# Allegro board KPRM_02v1.brd
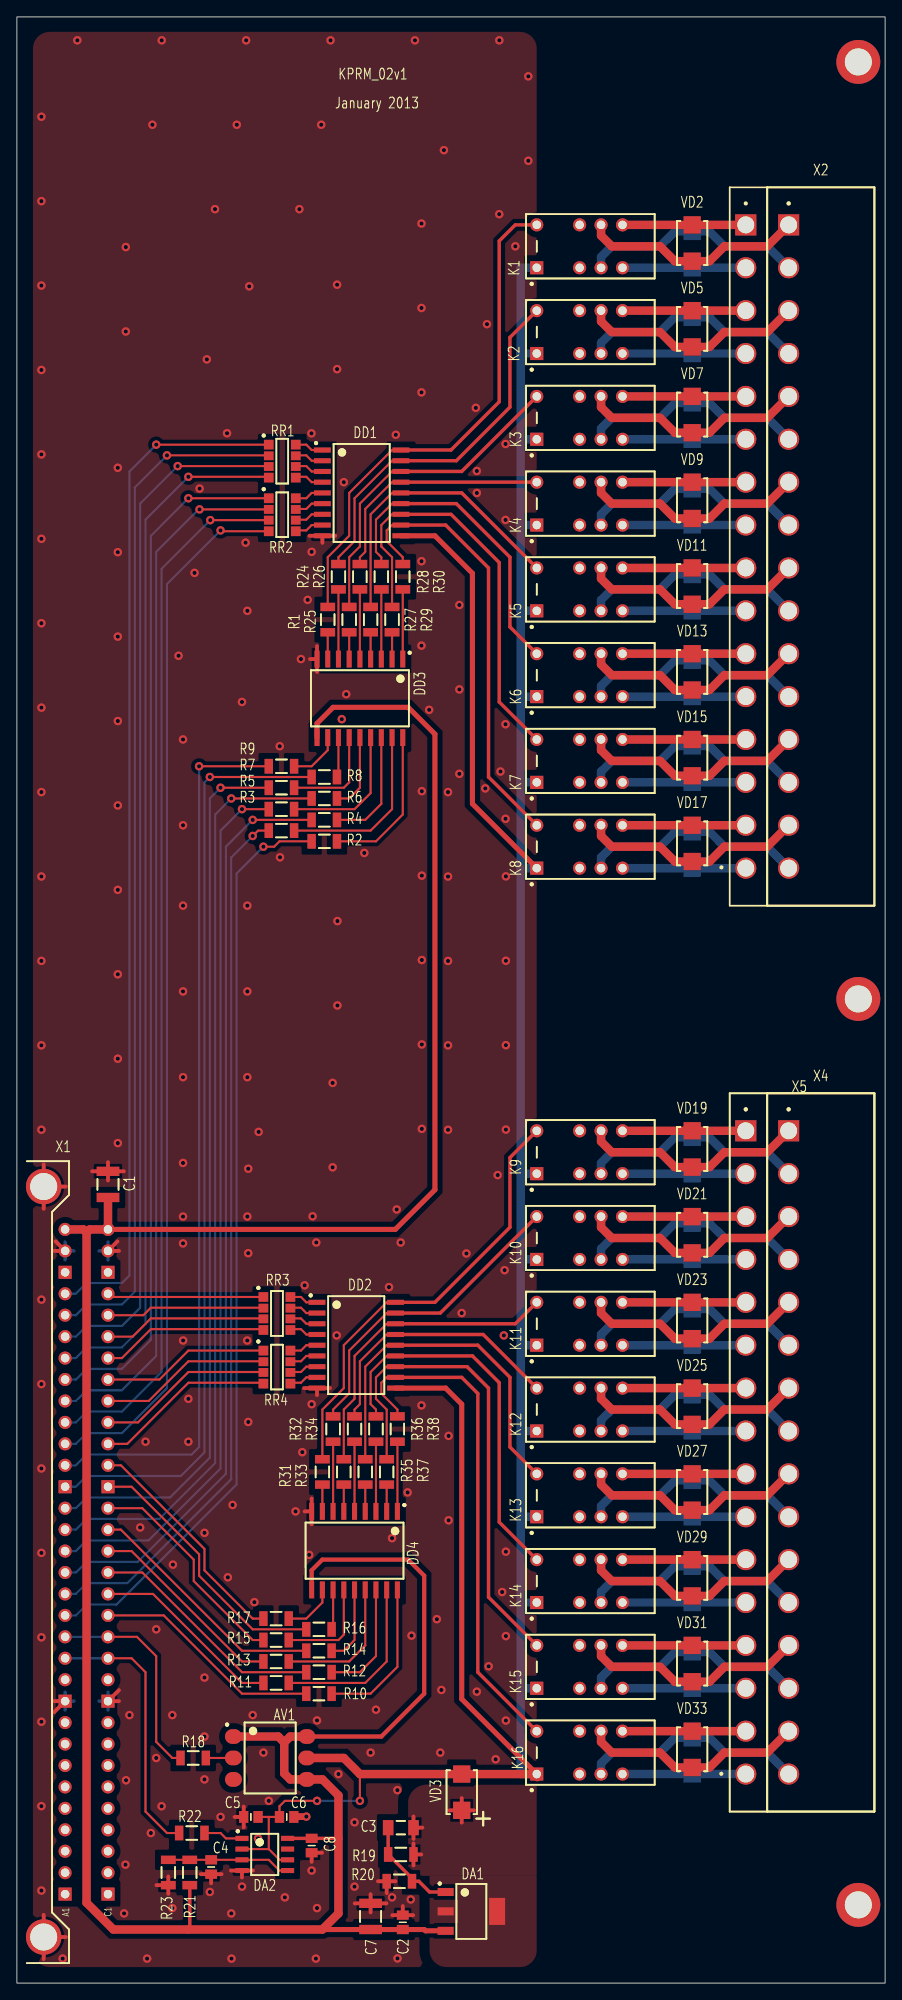
[diagram p0: board, top side]
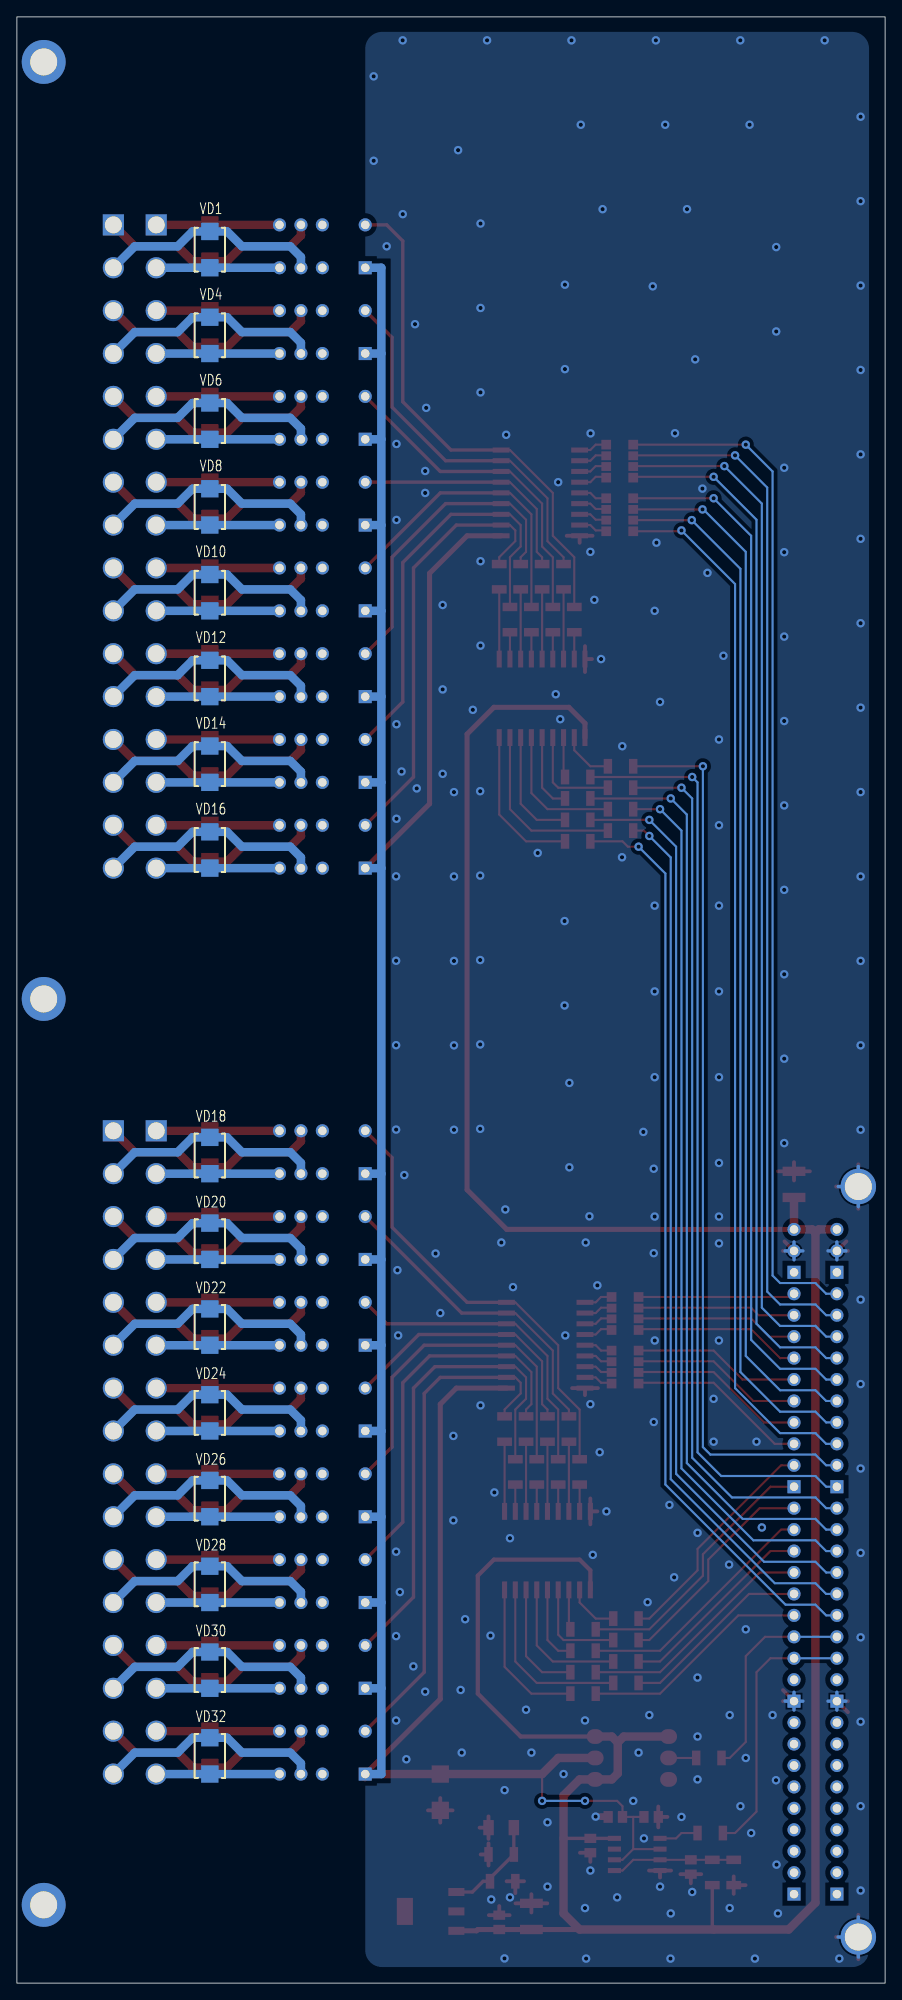
[diagram p1: board, bottom side, seen from below]

Outline 102.87 x 232.92 mm; copper layers: TOP, BOTTOM. Coordinates in mm from the lower left corner of the outline.
Outline path: rectangle 0,0 102.87,232.92

## Design rules (mm)
net group CC: nets CC0 CC1 CC2 CC3 CC4 CC5 CC6 CC7 CC8 CC9 CC10 CC11 CC12 CC13 CC14 CC15
net group CO: nets CO0 CO2 CO3 CO4 CO5 CO6 CO7 CO8 CO9 CO10 CO11 CO12 CO13 CO14 CO15

## Placement (name value [footprint] x y rotation side)
AV1  PVT412S  [SOIC254P978X342-6N]  30 26.67 0 top
C1  10,0u  [CAPC3225X270N]  10.79 94.62 90 top
C2  0,1u  [CAPC2013X95N]  45.72 7.2 90 top
C3  1,0u  [CAPC3216X95N]  45.49 18.41 180 top
C4  0,1u  [CAPC2013X95N]  23.02 13.76 270 top
C5  0,1u  [CAPC2013X95N]  27.72 19.69 180 top
C6  0,01u  [CAPC2013X95N]  31.96 19.69 0 top
C7  10,0u  [CAPC3225X270N]  41.91 7.9 90 top
C8  0,1u  [CAPC2013X95N]  34.92 16.3 270 top
DA1  LM317  [SOT230P700X180-4N]  53.85 8.5 0 top
DA2  LM293  [SOIC127P600X175-8N]  29.37 15.24 0 top
DD1  ULN2803A  [SOIC127P1030X265-18N]  40.84 176.53 0 top
DD2  ULN2803A  [SOIC127P1030X265-18N]  40.21 75.57 0 top
DD3  ULN2803A  [SOIC127P1030X265-18N]  40.64 152.19 270 top
DD4  ULN2803A  [SOIC127P1030X265-18N]  40 51.23 270 top
K1  FX2  [RELAY_FX2]  67.94 205.74 90 top
K2  FX2  [RELAY_FX2]  67.94 195.58 90 top
K3  FX2  [RELAY_FX2]  67.94 185.42 90 top
K4  FX2  [RELAY_FX2]  67.94 175.26 90 top
K5  FX2  [RELAY_FX2]  67.94 165.1 90 top
K6  FX2  [RELAY_FX2]  67.94 154.94 90 top
K7  FX2  [RELAY_FX2]  67.94 144.78 90 top
K8  FX2  [RELAY_FX2]  67.94 134.62 90 top
K9  FX2  [RELAY_FX2]  67.94 98.43 90 top
K10  FX2  [RELAY_FX2]  67.94 88.27 90 top
K11  FX2  [RELAY_FX2]  67.94 78.11 90 top
K12  FX2  [RELAY_FX2]  67.94 67.95 90 top
K13  FX2  [RELAY_FX2]  67.94 57.78 90 top
K14  FX2  [RELAY_FX2]  67.94 47.62 90 top
K15  FX2  [RELAY_FX2]  67.94 37.47 90 top
K16  FX2  [RELAY_FX2]  67.94 27.3 90 top
NOREF  -  [unnamed]  99.69 227.58 0 top
NOREF#2  -  [unnamed]  99.69 9.27 0 top
NOREF#3  -  [unnamed]  99.69 116.59 0 top
R1  18k  [RESC3116X65N]  36.83 161.52 90 top
R2  2k  [RESC3116X65N]  36.42 135.25 0 top
R3  2k  [RESC3116X65N]  31.34 136.53 0 top
R4  2k  [RESC3116X65N]  36.42 137.8 0 top
R5  2k  [RESC3116X65N]  31.34 139.06 0 top
R6  2k  [RESC3116X65N]  36.42 140.34 0 top
R7  2k  [RESC3116X65N]  31.34 141.61 0 top
R8  2k  [RESC3116X65N]  36.42 142.88 0 top
R9  2k  [RESC3116X65N]  31.34 144.15 0 top
R10  2k  [RESC3116X65N]  35.79 34.29 0 top
R11  2k  [RESC3116X65N]  30.71 35.56 0 top
R12  2k  [RESC3116X65N]  35.79 36.83 0 top
R13  2k  [RESC3116X65N]  30.71 38.1 0 top
R14  2k  [RESC3116X65N]  35.79 39.37 0 top
R15  2k  [RESC3116X65N]  30.71 40.64 0 top
R16  2k  [RESC3116X65N]  35.79 41.91 0 top
R17  2k  [RESC3116X65N]  30.71 43.18 0 top
R18  2k  [RESC3116X65N]  20.88 26.67 180 top
R19  270  [RESC3116X65N]  45.49 15.24 180 top
R20  1k  [RESC3116X65N]  45.31 12.07 0 top
R21  20k  [RESC3116X65N]  20.48 13.11 90 top
R22  2k  [RESC3116X65N]  20.72 17.78 180 top
R23  10k  [RESC3116X65N]  17.94 13.11 90 top
R24  18k  [RESC3116X65N]  38.1 166.6 90 top
R25  18k  [RESC3116X65N]  39.37 161.52 90 top
R26  18k  [RESC3116X65N]  40.64 166.6 90 top
R27  18k  [RESC3116X65N]  41.91 161.52 90 top
R28  18k  [RESC3116X65N]  43.18 166.6 90 top
R29  18k  [RESC3116X65N]  44.45 161.52 90 top
R30  18k  [RESC3116X65N]  45.72 166.6 90 top
R31  18k  [RESC3116X65N]  36.19 60.55 90 top
R32  18k  [RESC3116X65N]  37.46 65.64 90 top
R33  18k  [RESC3116X65N]  38.73 60.55 90 top
R34  18k  [RESC3116X65N]  40 65.64 90 top
R35  18k  [RESC3116X65N]  41.27 60.55 90 top
R36  18k  [RESC3116X65N]  42.54 65.64 90 top
R37  18k  [RESC3116X65N]  43.81 60.55 90 top
R38  18k  [RESC3116X65N]  45.08 65.64 90 top
RR1  4,7k  [RESCAX127P320X508X70-8N]  31.44 180.29 0 top
RR2  4,7k  [RESCAX127P320X508X70-8N]  31.44 173.94 0 top
RR3  4,7k  [RESCAX127P320X508X70-8N]  30.81 79.33 0 top
RR4  4,7k  [RESCAX127P320X508X70-8N]  30.81 72.98 0 top
VD1  300V  [DIOM5236X261N]  80.01 205.35 90 bottom
VD2  300V  [DIOM5236X261N]  80.01 206.13 90 top
VD3  STPS160U  [DIOM5236X261N]  52.7 22.62 270 top
VD4  300V  [DIOM5236X261N]  80.01 195.19 90 bottom
VD5  300V  [DIOM5236X261N]  80.01 195.97 90 top
VD6  300V  [DIOM5236X261N]  80.01 185.03 90 bottom
VD7  300V  [DIOM5236X261N]  80.01 185.81 90 top
VD8  300V  [DIOM5236X261N]  80.01 174.87 90 bottom
VD9  300V  [DIOM5236X261N]  80.01 175.65 90 top
VD10  300V  [DIOM5236X261N]  80.01 164.71 90 bottom
VD11  300V  [DIOM5236X261N]  80.01 165.49 90 top
VD12  300V  [DIOM5236X261N]  80.01 154.55 90 bottom
VD13  300V  [DIOM5236X261N]  80.01 155.33 90 top
VD14  300V  [DIOM5236X261N]  80.01 144.39 90 bottom
VD15  300V  [DIOM5236X261N]  80.01 145.17 90 top
VD16  300V  [DIOM5236X261N]  80.01 134.23 90 bottom
VD17  300V  [DIOM5236X261N]  80.01 135.01 90 top
VD18  300V  [DIOM5236X261N]  80.01 98.04 90 bottom
VD19  300V  [DIOM5236X261N]  80.01 98.82 90 top
VD20  300V  [DIOM5236X261N]  80.01 87.88 90 bottom
VD21  300V  [DIOM5236X261N]  80.01 88.66 90 top
VD22  300V  [DIOM5236X261N]  80.01 77.72 90 bottom
VD23  300V  [DIOM5236X261N]  80.01 78.5 90 top
VD24  300V  [DIOM5236X261N]  80.01 67.56 90 bottom
VD25  300V  [DIOM5236X261N]  80.01 68.34 90 top
VD26  300V  [DIOM5236X261N]  80.01 57.39 90 bottom
VD27  300V  [DIOM5236X261N]  80.01 58.17 90 top
VD28  300V  [DIOM5236X261N]  80.01 47.23 90 bottom
VD29  300V  [DIOM5236X261N]  80.01 48.02 90 top
VD30  300V  [DIOM5236X261N]  80.01 37.08 90 bottom
VD31  300V  [DIOM5236X261N]  80.01 37.85 90 top
VD32  300V  [DIOM5236X261N]  80.01 26.91 90 bottom
VD33  300V  [DIOM5236X261N]  80.01 27.7 90 top
X1  DIN 32x2 MR  [DIN_41612_64_MR]  2.54 49.91 0 top
X2  231-576/001-000  [WAGO_231_576_001_000]  95.25 170.18 0 top
X3  232-376  [WAGO_232_376]  92.71 170.18 0 top
X4  231-576/001-000  [WAGO_231_576_001_000]  95.25 62.87 0 top
X5  232-376  [WAGO_232_376]  92.71 62.87 0 top

## Library data of the parts
AV1 = PVT412: alternate symbols: (SOIC254P978X342-6M)
C1-C8 = CAP_NP
DA1 = LM317EMP
DA2 = LM293
DD1-DD4 = ULN2803A
K1-K16 = RELAY_FX2
R1-R38 = RES_0.25W
RR1-RR4 = RES_ARRAY_4
VD1 VD2 VD4-VD33 = DIODE_TVS_BI
VD3 = DIODE_SCHOTTKY
X1 = CON_32X2
X2-X5 = CON_16

## Footprints (pads in the part's own frame, mm; a bottom-side part is the same pattern mirrored in y, then rotated)
CAPC2013X95N
  rect 1.1x1.4 smd: 1(-0.85,0) 2(0.85,0)
CAPC3216X95N
  rect 1.25x1.8 smd: 1(-1.5,0) 2(1.5,0)
CAPC3225X270N
  rect 1.1x2.7 smd: 1(-1.55,0) 2(1.55,0)
DIN_41612_64_MR
  rect 1.55x1.55 hole 1: A1(3.175,-39.37) A10(3.175,-16.51) A20(3.175,8.89) A30(3.175,34.29) C1(8.255,-39.37) C10(8.255,-16.51) C20(8.255,8.89) C30(8.255,34.29)
  round 1.55 hole 1: A2(3.175,-36.83) A3(3.175,-34.29) A4(3.175,-31.75) A5(3.175,-29.21) A6(3.175,-26.67) A7(3.175,-24.13) A8(3.175,-21.59) A9(3.175,-19.05) A11(3.175,-13.97) A12(3.175,-11.43) A13(3.175,-8.89) A14(3.175,-6.35) A15(3.175,-3.81) A16(3.175,-1.27) A17(3.175,1.27) A18(3.175,3.81) A19(3.175,6.35) A21(3.175,11.43) A22(3.175,13.97) A23(3.175,16.51) A24(3.175,19.05) A25(3.175,21.59) A26(3.175,24.13) A27(3.175,26.67) A28(3.175,29.21) A29(3.175,31.75) A31(3.175,36.83) A32(3.175,39.37) C2(8.255,-36.83) C3(8.255,-34.29) C4(8.255,-31.75) C5(8.255,-29.21) C6(8.255,-26.67) C7(8.255,-24.13) C8(8.255,-21.59) C9(8.255,-19.05) C11(8.255,-13.97) C12(8.255,-11.43) C13(8.255,-8.89) C14(8.255,-6.35) C15(8.255,-3.81) C16(8.255,-1.27) C17(8.255,1.27) C18(8.255,3.81) C19(8.255,6.35) C21(8.255,11.43) C22(8.255,13.97) C23(8.255,16.51) C24(8.255,19.05) C25(8.255,21.59) C26(8.255,24.13) C27(8.255,26.67) C28(8.255,29.21) C29(8.255,31.75) C31(8.255,36.83) C32(8.255,39.37)
  round 4.2 hole 3.2: HOLE1(0.635,-44.45) HOLE2(0.635,44.45)
DIOM5236X261N
  rect 2.05x2.05 smd: A(2.15,0) C(-2.15,0)
RELAY_FX2
  rect 1.55x1.55 hole 1: 1(-2.54,6.35)
  round 1.55 hole 1: 3(-2.54,1.27) 4(-2.54,-1.27) 5(-2.54,-3.81) 6(2.54,-3.81) 7(2.54,-1.27) 8(2.54,1.27) 10(2.54,6.35)
RESC3116X65N
  rect 1x1.75 smd: 1(-1.5,0) 2(1.5,0)
RESCAX127P320X508X70-8N
  rect 1.15x1.15 smd: 1(-1.6,1.955) 4(-1.6,-1.955) 5(1.6,-1.955) 8(1.6,1.955)
  rect 1.15x1.05 smd: 2(-1.6,0.635) 3(-1.6,-0.635) 6(1.6,-0.635) 7(1.6,0.635)
SOIC127P600X175-8N
  rect 1.55x0.6 smd: 1(-2.7,1.905) 2(-2.7,0.635) 3(-2.7,-0.635) 4(-2.7,-1.905) 5(2.7,-1.905) 6(2.7,-0.635) 7(2.7,0.635) 8(2.7,1.905)
SOIC127P1030X265-18N
  rect 2x0.6 smd: 1(-4.65,5.08) 2(-4.65,3.81) 3(-4.65,2.54) 4(-4.65,1.27) 5(-4.65,0) 6(-4.65,-1.27) 7(-4.65,-2.54) 8(-4.65,-3.81) 9(-4.65,-5.08) 10(4.65,-5.08) 11(4.65,-3.81) 12(4.65,-2.54) 13(4.65,-1.27) 14(4.65,0) 15(4.65,1.27) 16(4.65,2.54) 17(4.65,3.81) 18(4.65,5.08)
SOIC254P978X342-6N
  oval 2x1.75 smd: 1(-4.35,2.54) 2(-4.35,0) 3(-4.35,-2.54) 4(4.35,-2.54) 5(4.35,0) 6(4.35,2.54)
SOT230P700X180-4N
  rect 1.9x0.95 smd: 1(-3.05,2.3) 2(-3.05,0) 3(-3.05,-2.3)
  rect 1.9x3.2 smd: 4(3.05,0)
unnamed
  round 5.2 hole 3.2: 1(0,0)
WAGO_231_576_001_000
  rect 2.5x2.5 hole 2: 1(-3.81,38.1)
  round 2.5 hole 2: 2(-3.81,33.02) 3(-3.81,27.94) 4(-3.81,22.86) 5(-3.81,17.78) 6(-3.81,12.7) 7(-3.81,7.62) 8(-3.81,2.54) 9(-3.81,-2.54) 10(-3.81,-7.62) 11(-3.81,-12.7) 12(-3.81,-17.78) 13(-3.81,-22.86) 14(-3.81,-27.94) 15(-3.81,-33.02) 16(-3.81,-38.1)
WAGO_232_376
  rect 2.5x2.5 hole 2: 1(-6.35,38.1)
  round 2.5 hole 2: 2(-6.35,33.02) 3(-6.35,27.94) 4(-6.35,22.86) 5(-6.35,17.78) 6(-6.35,12.7) 7(-6.35,7.62) 8(-6.35,2.54) 9(-6.35,-2.54) 10(-6.35,-7.62) 11(-6.35,-12.7) 12(-6.35,-17.78) 13(-6.35,-22.86) 14(-6.35,-27.94) 15(-6.35,-33.02) 16(-6.35,-38.1)

## Nets
GNDE: C1.2 C2.2 C4.2 C5.2 C6.2 C7.2 C8.2 DA2.4 DD1.9(GND) DD2.9(GND) DD3.9(GND) DD4.9(GND) R20.1 R23.1 X1.A10 X1.A31 X1.C10 X1.C31 X1.HOLE1 X1.HOLE2
1K1-1: K1.5(NO1) VD1.C X3.2
1K1-2: K1.4(01) VD1.A X2.2
1K2-1: K1.6(NO2) VD2.A X3.1
1K2-2: K1.7(02) VD2.C X2.1
2K1-1: K2.5(NO1) VD4.C X3.4
2K1-2: K2.4(01) VD4.A X2.4
2K2-1: K2.6(NO2) VD5.A X3.3
2K2-2: K2.7(02) VD5.C X2.3
3K1-1: K3.5(NO1) VD6.C X3.6
3K1-2: K3.4(01) VD6.A X2.6
3K2-1: K3.6(NO2) VD7.A X3.5
3K2-2: K3.7(02) VD7.C X2.5
4K1-1: K4.5(NO1) VD8.C X3.8
4K1-2: K4.4(01) VD8.A X2.8
4K2-1: K4.6(NO2) VD9.A X3.7
4K2-2: K4.7(02) VD9.C X2.7
5K1-1: K5.5(NO1) VD10.C X3.10
5K1-2: K5.4(01) VD10.A X2.10
5K2-1: K5.6(NO2) VD11.A X3.9
5K2-2: K5.7(02) VD11.C X2.9
6K1-1: K6.5(NO1) VD12.C X3.12
6K1-2: K6.4(01) VD12.A X2.12
6K2-1: K6.6(NO2) VD13.A X3.11
6K2-2: K6.7(02) VD13.C X2.11
7K1-1: K7.5(NO1) VD14.C X3.14
7K1-2: K7.4(01) VD14.A X2.14
7K2-1: K7.6(NO2) VD15.A X3.13
7K2-2: K7.7(02) VD15.C X2.13
8K1-1: K8.5(NO1) VD16.C X3.16
8K1-2: K8.4(01) VD16.A X2.16
8K2-1: K8.6(NO2) VD17.A X3.15
8K2-2: K8.7(02) VD17.C X2.15
9K1-1: K9.5(NO1) VD18.C X5.2
9K1-2: K9.4(01) VD18.A X4.2
9K2-1: K9.6(NO2) VD19.A X5.1
9K2-2: K9.7(02) VD19.C X4.1
10K1-1: K10.5(NO1) VD20.C X5.4
10K1-2: K10.4(01) VD20.A X4.4
10K2-1: K10.6(NO2) VD21.A X5.3
10K2-2: K10.7(02) VD21.C X4.3
11K1-1: K11.5(NO1) VD22.C X5.6
11K1-2: K11.4(01) VD22.A X4.6
11K2-1: K11.6(NO2) VD23.A X5.5
11K2-2: K11.7(02) VD23.C X4.5
12K1-1: K12.5(NO1) VD24.C X5.8
12K1-2: K12.4(01) VD24.A X4.8
12K2-1: K12.6(NO2) VD25.A X5.7
12K2-2: K12.7(02) VD25.C X4.7
13K1-1: K13.5(NO1) VD26.C X5.10
13K1-2: K13.4(01) VD26.A X4.10
13K2-1: K13.6(NO2) VD27.A X5.9
13K2-2: K13.7(02) VD27.C X4.9
14K1-1: K14.5(NO1) VD28.C X5.12
14K1-2: K14.4(01) VD28.A X4.12
14K2-1: K14.6(NO2) VD29.A X5.11
14K2-2: K14.7(02) VD29.C X4.11
15K1-1: K15.5(NO1) VD30.C X5.14
15K1-2: K15.4(01) VD30.A X4.14
15K2-1: K15.6(NO2) VD31.A X5.13
15K2-2: K15.7(02) VD31.C X4.13
16K1-1: K16.5(NO1) VD32.C X5.16
16K1-2: K16.4(01) VD32.A X4.16
16K2-1: K16.6(NO2) VD33.A X5.15
16K2-2: K16.7(02) VD33.C X4.15
+24BE: AV1.1 AV1.4 AV1.6 C1.1 C2.1 C7.1 C8.1 DA1.3(IN) DA2.8 DD3.10(COM) DD4.10(COM) R21.1 X1.A32 X1.C32
+UK: AV1.5 C5.1 C6.1 DA2.2(IN-) DA2.6(IN-) DD1.10(COM) DD2.10(COM) K1.1(IN+) K2.1(IN+) K3.1(IN+) K4.1(IN+) K5.1(IN+) K6.1(IN+) K7.1(IN+) K8.1(IN+) K9.1(IN+) K10.1(IN+) K11.1(IN+) K12.1(IN+) K13.1(IN+) K14.1(IN+) K15.1(IN+) K16.1(IN+) VD3.C
CC0: DD3.8(8B) R1.1
CC1: DD3.7(7B) R24.1
CC2: DD3.6(6B) R25.1
CC3: DD3.5(5B) R26.1
CC4: DD3.4(4B) R27.1
CC5: DD3.3(3B) R28.1
CC6: DD3.2(2B) R29.1
CC7: DD3.1(1B) R30.1
CC8: DD4.8(8B) R31.1
CC9: DD4.7(7B) R32.1
CC10: DD4.6(6B) R33.1
CC11: DD4.5(5B) R34.1
CC12: DD4.4(4B) R35.1
CC13: DD4.3(3B) R36.1
CC14: DD4.2(2B) R37.1
CC15: DD4.1(1B) R38.1
CO0: DD1.18(1C) K1.10(IN-) R1.2
CO1: DD1.17(2C) K2.10(IN-) R24.2
CO2: DD1.16(3C) K3.10(IN-) R25.2
CO3: DD1.15(4C) K4.10(IN-) R26.2
CO4: DD1.14(5C) K5.10(IN-) R27.2
CO5: DD1.13(6C) K6.10(IN-) R28.2
CO6: DD1.12(7C) K7.10(IN-) R29.2
CO7: DD1.11(8C) K8.10(IN-) R30.2
CO8: DD2.18(1C) K9.10(IN-) R31.2
CO9: DD2.17(2C) K10.10(IN-) R32.2
CO10: DD2.16(3C) K11.10(IN-) R33.2
CO11: DD2.15(4C) K12.10(IN-) R34.2
CO12: DD2.14(5C) K13.10(IN-) R35.2
CO13: DD2.13(6C) K14.10(IN-) R36.2
CO14: DD2.12(7C) K15.10(IN-) R37.2
CO15: DD2.11(8C) K16.10(IN-) R38.2
COMO0: RR1.1 X1.A29
COMO1: RR1.2 X1.A28
COMO2: RR1.3 X1.A27
COMO3: RR1.4 X1.A26
COMO4: RR2.1 X1.A25
COMO5: RR2.2 X1.A24
COMO6: RR2.3 X1.A23
COMO7: RR2.4 X1.A22
COMO8: RR3.1 X1.C29
COMO9: RR3.2 X1.C28
COMO10: RR3.3 X1.C27
COMO11: RR3.4 X1.C26
COMO12: RR4.1 X1.C25
COMO13: RR4.2 X1.C24
COMO14: RR4.3 X1.C23
COMO15: RR4.4 X1.C22
ENABLE: R18.2 X1.A13 X1.C13
KCOMO0: R9.1 X1.A21
KCOMO1: R8.1 X1.A20
KCOMO2: R7.1 X1.A19
KCOMO3: R6.1 X1.A18
KCOMO4: R5.1 X1.A17
KCOMO5: R4.1 X1.A16
KCOMO6: R3.1 X1.A15
KCOMO7: R2.1 X1.A14
KCOMO8: R17.1 X1.C21
KCOMO9: R16.1 X1.C20
KCOMO10: R15.1 X1.C19
KCOMO11: R14.1 X1.C18
KCOMO12: R13.1 X1.C17
KCOMO13: R12.1 X1.C16
KCOMO14: R11.1 X1.C15
KCOMO15: R10.1 X1.C14
KENABLE: R22.2 X1.A12 X1.C12
N1355638: C3.1 DA1.2(OUT#1) DA1.4(OUT#2) R19.1 VD3.A
N1355646: C4.1 DA2.3(IN+) DA2.5(IN+) R21.2 R23.2
N1356446: DD1.4(4B) RR1.5
N1356458: DD1.3(3B) RR1.6
N1356478: DD1.2(2B) RR1.7
N1356494: DD1.1(1B) RR1.8
N1356502: DD1.5(5B) RR2.8
N1356524: DD1.6(6B) RR2.7
N1356542: DD1.7(7B) RR2.6
N1356554: DD1.8(8B) RR2.5
N1357124: DD2.4(4B) RR3.5
N1357136: DD2.3(3B) RR3.6
N1357148: DD2.2(2B) RR3.7
N1357164: DD2.1(1B) RR3.8
N1357172: DD2.5(5B) RR4.8
N1357190: DD2.6(6B) RR4.7
N1357214: DD2.7(7B) RR4.6
N1357226: DD2.8(8B) RR4.5
N1358398: C3.2 DA1.1(ADJ) R19.2 R20.2
N1359348: DD3.15(4C) R5.2
N1359364: DD3.14(5C) R6.2
N1359384: DD3.13(6C) R7.2
N1359396: DD3.12(7C) R8.2
N1359412: DD3.11(8C) R9.2
N1359430: DD3.16(3C) R4.2
N1359442: DD3.17(2C) R3.2
N1359460: DD3.18(1C) R2.2
N1359476: DD4.18(1C) R10.2
N1359548: DD4.17(2C) R11.2
N1359630: DD4.16(3C) R12.2
N1359720: DD4.15(4C) R13.2
N1359780: DD4.14(5C) R14.2
N1359844: DD4.13(6C) R15.2
N1359856: DD4.12(7C) R16.2
N1359868: DD4.11(8C) R17.2
N1360082: AV1.2 R18.1
N1360698: DA2.1(OUT) R22.1

Pads without a net: AV1 3; DA2 7; K1 3 8; K2 3 8; K3 3 8; K4 3 8; K5 3 8; K6 3 8; K7 3 8; K8 3 8; K9 3 8; K10 3 8; K11 3 8; K12 3 8; K13 3 8; K14 3 8; K15 3 8; K16 3 8; NOREF 1; NOREF#2 1; NOREF#3 1; X1 A1 A2 A3 A4 A5 A6 A7 A8 A9 A11 A30 C1 C2 C3 C4 C5 C6 C7 C8 C9 C11 C30

## Via types
v1: diameter 1, hole 0.5, TOP to BOTTOM, 223 vias

## Routing (per net, layer and track width the routed paths; a pad name or vN(x,y) marks a point on that pad's centre or on a via; arc(x,y) is an arc through that point)
GNDE: length 111.1
  TOP w0.453: 26.88,18.46 C5.2 ; C5.2 26.88,20.91 ; C5.2 25.8,19.69 ; X1.HOLE1 3.17,8.09 ; X1.HOLE1 5.8,5.46 ; X1.HOLE1 3.17,2.83 ; 21.79,12.91 C4.2 ; C4.2 23.02,11.83 ; C4.2 24.25,12.91 ; 8.92,96.17 C1.2 ; C1.2 10.79,95.09 ; C1.2 12.67,96.17 ; C1.2 10.79,97.24 ; 34.03,70.48 DD2.9 ; DD2.9 37.09,70.48 ; DD2.9 35.56,69.66 ; X1.HOLE2 5.8,94.36 ; X1.HOLE2 3.17,91.73 ; X1.HOLE2 3.17,96.99 ; 42.79,12.07 R20.1 ; R20.1 43.81,10.66 ; R20.1 44.84,12.07 ; DD3.9 35.56,158.37 ; DD3.9 34.73,156.84 ; DD3.9 35.56,155.32 ; DD1.9 37.72,171.45 ; DD1.9 36.19,170.62 ; DD1.9 34.67,171.45 ; 40.03,9.45 41.91,9.45 ; 41.91,9.45 41.91,8.37 ; 41.91,9.45 41.91,10.53 ; 41.91,9.45 43.79,9.45 ; 11.92,87.86 X1.C31 12.1,86.74 ; 12.1,33.4 X1.C10 12.1,34.7 ; 34.92,54.35 DD4.9 ; DD4.9 34.92,57.41 ; DD4.9 34.1,55.88 ; 25.37,13.34 DA2.4 ; DA2.4 27.97,13.34 ; DA2.4 26.67,12.51 ; R23.1 17.94,12.63 ; R23.1 16.54,11.61 ; R23.1 17.94,10.58 ; 34.92,14.37 C8.2 36.15,15.45 ; 4.41,33.4 X1.A10 4.41,32.1 ; 4.41,86.74 X1.A31 4.59,87.86 ; 44.49,8.05 C2.2 ; C2.2 45.72,9.13 ; C2.2 46.95,8.05
  TOP w0.8: C6.2 32.85,19.73 v1(34.29,19.73)
  BOTTOM w0.403: X1.A10 6.77,33.4 ; X1.A10 5.71,32.35 ; X1.A10 4.66,33.4 ; X1.A10 5.71,34.45 ; X1.HOLE1 3.17,7.84 ; X1.HOLE1 5.55,5.46 ; X1.HOLE1 3.17,3.08 ; X1.C31 11.85,86.74 ; X1.C31 9.74,86.74 ; X1.C31 10.79,87.8 ; X1.C31 10.79,85.69 ; 4.66,86.74 X1.A31 ; X1.A31 5.71,85.69 ; X1.A31 6.77,86.74 ; X1.A31 5.71,87.8 ; 10.79,32.35 X1.C10 ; X1.C10 10.79,34.45 ; X1.C10 9.74,33.4 ; X1.C10 11.85,33.4 ; X1.HOLE2 5.55,94.36 ; X1.HOLE2 3.17,96.74 ; X1.HOLE2 3.17,91.98
  vias: v1(2.9,221.09) v1(2.9,211.09) v1(2.9,201.09) v1(2.9,191.09) v1(2.9,181.09) v1(2.9,171.09) v1(2.9,161.09) v1(2.9,151.09) v1(2.9,141.09) v1(2.9,131.09) v1(2.9,121.09) v1(2.9,111.09) v1(2.9,101.09) v1(2.9,80.96) v1(2.9,70.96) v1(2.9,60.96) v1(2.9,50.96) v1(2.9,40.96) v1(2.9,30.96) v1(2.9,20.96) v1(2.9,10.96) v1(5.43,2.91) v1(7.16,230.14) v1(11.96,179.51) v1(11.96,169.51) v1(11.96,159.51) v1(11.96,149.51) v1(11.96,139.51) v1(11.96,129.51) v1(11.96,119.51) v1(11.96,109.51) v1(11.96,99.51) v1(12.7,8.26) v1(12.9,205.65) v1(12.9,195.65) v1(12.93,24.03) v1(12.86,14.03) v1(13.33,31.75) v1(14.6,53.98) v1(15.24,64.14) v1(15.43,2.91) v1(15.88,17.78) v1(16.06,220.14) v1(16.51,41.91) v1(16.51,26.67) v1(17.16,230.14) v1(17.14,20.95) v1(18.41,31.75) v1(18.41,8.89) v1(18.49,49.57) v1(19.16,157.24) v1(19.68,147.32) v1(19.68,137.16) v1(19.68,127.64) v1(19.68,117.48) v1(19.68,107.32) v1(19.68,97.16) v1(19.68,90.81) v1(19.68,87.63) v1(19.69,76.12) v1(20.32,69.22) v1(20.32,64.14) v1(21.05,167.06) v1(21.65,177.04) v1(22.22,53.34) v1(22.22,36.2) v1(22.22,29.21) v1(22.22,24.13) v1(22.51,192.35) v1(22.86,10.79) v1(23.47,210.14) v1(24.13,19.69) v1(24.9,183.6) v1(25,48.07) v1(25.4,8.26) v1(25.43,2.91) v1(25.56,56.64) v1(26.06,220.14) v1(26.67,151.77) v1(26.67,11.43) v1(27.1,170.63) v1(27.16,230.14) v1(27.3,162.56) v1(27.3,127.64) v1(27.3,117.48) v1(27.3,107.32) v1(27.3,90.81) v1(27.29,76.12) v1(27.41,96.47) v1(27.41,86.47) v1(27.41,66.47) v1(27.53,201) v1(27.94,31.75) v1(28.14,45.13) v1(28.57,17.14) v1(28.65,100.83) v1(29.21,27.3) v1(29.84,21.59) v1(31.14,146.52) v1(31.17,133.37) v1(31.75,10.16) v1(33.02,55.88) v1(33.47,210.14) v1(33.65,156.84) v1(33.82,62.89) v1(34.09,82.66) v1(34.45,163.86) v1(34.64,50.73) v1(34.9,183.58) v1(34.92,169.55) v1(34.92,68.58) v1(34.92,13.34) v1(35.03,90.83) v1(35.43,2.91) v1(35.47,87.73) v1(35.56,31.12) v1(35.56,8.89) v1(36.06,220.14) v1(37.16,230.14) v1(37.41,106.64) v1(37.41,96.64) v1(37.94,201.19) v1(37.94,191.19) v1(37.89,76.73) v1(37.98,125.81) v1(37.98,115.81) v1(38.1,24.77) v1(38.49,149.72) v1(38.73,177.8) v1(39.02,152.68) v1(40,19.05) v1(40,11.43) v1(41.16,133.88) v1(41.91,27.3) v1(42.54,32.38) v1(44.09,82.45) v1(44.45,52.7) v1(44.45,10.16) v1(44.9,183.41) v1(45,91.65) v1(45.08,22.86) v1(45.09,2.93) v1(45.47,87.73) v1(46.29,58.12) v1(46.66,9.91) v1(46.76,41.16) v1(47.16,230.14) v1(47.94,208.44) v1(47.94,198.44) v1(47.94,188.44) v1(47.94,168.44) v1(47.94,158.44) v1(47.94,68.44) v1(47.98,141.19) v1(47.98,131.19) v1(47.98,121.19) v1(47.98,111.19) v1(47.98,101.19) v1(48.85,150.83) v1(49.76,43.11) v1(50.16,27.3) v1(50.29,34.73) v1(50.59,217.13) v1(51.08,141.09) v1(51.08,131.09) v1(51.08,121.09) v1(51.08,111.09) v1(51.08,101.09) v1(51.15,64.82) v1(51.15,54.82) v1(52.42,163.25) v1(52.42,153.25) v1(52.42,143.25) v1(52.7,79.38) v1(53.26,86.43) v1(54.37,186.6) v1(54.49,179.12) v1(54.49,176.53) v1(54.49,34.52) v1(55.49,141.53) v1(55.7,196.52) v1(55.89,37.52) v1(56.72,26.52) v1(56.97,95.72) v1(57.16,230.14) v1(57.15,209.55) v1(57.29,143.53) v1(57.49,46.32) v1(57.69,76.73) v1(57.78,84.46) v1(57.89,182.33) v1(57.89,173.33) v1(57.89,149.12) v1(57.89,137.93) v1(57.94,131.11) v1(57.94,121.11) v1(57.94,111.11) v1(57.94,101.11) v1(57.94,51.11) v1(57.94,41.11) v1(57.94,31.11) v1(59.05,205.74) v1(60.59,225.87) v1(60.59,215.87)
1K1-1: length 14.6
  BOTTOM w1: K1.5 X3.2
1K1-2: length 26.5
  BOTTOM w1: K1.4 69.21,204.47 70.48,205.74 76.2,205.74 77.96,207.5 VD1.A 82.06,207.5 83.82,205.74 88.9,205.74 X2.2
1K2-1: length 14.6
  TOP w1: K1.6 VD2.A X3.1
1K2-2: length 26.5
  TOP w1: X2.1 88.9,205.74 83.82,205.74 82.06,203.98 77.96,203.98 76.2,205.74 70.48,205.74 69.21,207.01 K1.7
2K1-1: length 14.6
  BOTTOM w1: K2.5 VD4.C X3.4
2K1-2: length 26.5
  BOTTOM w1: X2.4 88.9,195.58 83.82,195.58 82.06,197.34 VD4.A 77.96,197.34 76.2,195.58 70.48,195.58 69.21,194.31 K2.4
2K2-1: length 14.6
  TOP w1: K2.6 VD5.A X3.3
2K2-2: length 26.5
  TOP w1: K2.7 69.21,196.85 70.48,195.58 76.2,195.58 77.96,193.82 VD5.C 82.06,193.82 83.82,195.58 88.9,195.58 X2.3
3K1-1: length 14.6
  BOTTOM w1: X3.6 VD6.C K3.5
3K1-2: length 26.5
  BOTTOM w1: X2.6 88.9,185.42 83.82,185.42 82.06,187.18 VD6.A 77.96,187.18 76.2,185.42 70.48,185.42 69.21,184.15 K3.4
3K2-1: length 14.6
  TOP w1: X3.5 VD7.A K3.6
3K2-2: length 26.5
  TOP w1: X2.5 88.9,185.42 83.82,185.42 82.06,183.66 VD7.C 77.96,183.66 76.2,185.42 70.48,185.42 69.21,186.69 K3.7
4K1-1: length 14.6
  BOTTOM w1: X3.8 VD8.C K4.5
4K1-2: length 26.5
  BOTTOM w1: K4.4 69.21,173.99 70.48,175.26 76.2,175.26 77.96,177.02 VD8.A 82.06,177.02 83.82,175.26 88.9,175.26 X2.8
4K2-1: length 14.6
  TOP w1: X3.7 VD9.A K4.6
4K2-2: length 26.5
  TOP w1: X2.7 88.9,175.26 83.82,175.26 82.06,173.5 VD9.C 77.96,173.5 76.2,175.26 70.48,175.26 69.21,176.53 K4.7
5K1-1: length 14.6
  BOTTOM w1: X3.10 VD10.C K5.5
5K1-2: length 26.5
  BOTTOM w1: X2.10 88.9,165.1 83.82,165.1 82.06,166.86 VD10.A 77.96,166.86 76.2,165.1 70.48,165.1 69.21,163.83 K5.4
5K2-1: length 14.6
  TOP w1: X3.9 VD11.A 71.75,167.64
5K2-2: length 26.5
  TOP w1: 69.21,167.64 69.21,166.37 70.48,165.1 76.2,165.1 77.96,163.34 VD11.C 82.06,163.34 83.82,165.1 88.9,165.1 X2.9
6K1-1: length 14.6
  BOTTOM w1: K6.5 VD12.C X3.12
6K1-2: length 26.5
  BOTTOM w1: X2.12 88.9,154.94 83.82,154.94 82.06,156.7 VD12.A 77.96,156.7 76.2,154.94 70.48,154.94 69.21,153.67 K6.4
6K2-1: length 14.6
  TOP w1: 71.75,157.48 VD13.A X3.11
6K2-2: length 26.5
  TOP w1: X2.11 88.9,154.94 83.82,154.94 82.06,153.18 VD13.C 77.96,153.18 76.2,154.94 70.48,154.94 69.21,156.21 69.21,157.48
7K1-1: length 14.6
  BOTTOM w1: X3.14 VD14.C K7.5
7K1-2: length 26.5
  BOTTOM w1: K7.4 69.21,143.51 70.48,144.78 76.2,144.78 77.96,146.54 VD14.A 82.06,146.54 83.82,144.78 88.9,144.78 X2.14
7K2-1: length 14.6
  TOP w1: K7.6 VD15.A X3.13
7K2-2: length 26.5
  TOP w1: K7.7 69.21,146.05 70.48,144.78 76.2,144.78 77.96,143.02 VD15.C 82.06,143.02 83.82,144.78 88.9,144.78 X2.13
8K1-1: length 14.6
  BOTTOM w1: X3.16 71.75,132.08
8K1-2: length 26.5
  BOTTOM w1: X2.16 88.9,134.62 83.82,134.62 82.06,136.38 VD16.A 77.96,136.38 76.2,134.62 70.48,134.62 69.21,133.35 69.21,132.08
8K2-1: length 14.6
  TOP w1: K8.6 VD17.A 86.36,137.16
8K2-2: length 26.5
  TOP w1: K8.7 69.21,135.89 70.48,134.62 76.2,134.62 77.96,132.86 VD17.C 82.06,132.86 83.82,134.62 88.9,134.62 91.44,137.16
9K1-1: length 14.6
  BOTTOM w1: X5.2 VD18.C K9.5
9K1-2: length 26.5
  BOTTOM w1: X4.2 88.9,98.43 83.82,98.43 82.06,100.19 VD18.A 77.96,100.19 76.2,98.43 70.48,98.43 69.21,97.16 K9.4
9K2-1: length 14.6
  TOP w1: X5.1 VD19.A K9.6
9K2-2: length 26.5
  TOP w1: X4.1 88.9,98.43 83.82,98.43 82.06,96.67 VD19.C 77.96,96.67 76.2,98.43 70.48,98.43 69.21,99.7 K9.7
10K1-1: length 14.6
  BOTTOM w1: K10.5 VD20.C X5.4
10K1-2: length 26.5
  BOTTOM w1: X4.4 88.9,88.27 83.82,88.27 82.06,90.03 VD20.A 77.96,90.03 76.2,88.27 70.48,88.27 69.21,87 K10.4
10K2-1: length 14.6
  TOP w1: X5.3 VD21.A K10.6
10K2-2: length 26.5
  TOP w1: X4.3 88.9,88.27 83.82,88.27 82.06,86.51 VD21.C 77.96,86.51 76.2,88.27 70.48,88.27 69.21,89.54 K10.7
11K1-1: length 14.6
  BOTTOM w1: K11.5 VD22.C X5.6
11K1-2: length 26.5
  BOTTOM w1: K11.4 69.21,76.84 70.48,78.11 76.2,78.11 77.96,79.87 VD22.A 82.06,79.87 83.82,78.11 88.9,78.11 X4.6
11K2-1: length 14.6
  TOP w1: X5.5 VD23.A K11.6
11K2-2: length 26.5
  TOP w1: X4.5 88.9,78.11 83.82,78.11 82.06,76.34 VD23.C 77.96,76.34 76.2,78.11 70.48,78.11 69.21,79.38 K11.7
12K1-1: length 14.6
  BOTTOM w1: K12.5 VD24.C X5.8
12K1-2: length 26.5
  BOTTOM w1: X4.8 88.9,67.95 83.82,67.95 82.06,69.7 VD24.A 77.96,69.7 76.2,67.95 70.48,67.95 69.21,66.67 K12.4
12K2-1: length 14.6
  TOP w1: X5.7 VD25.A K12.6
12K2-2: length 26.5
  TOP w1: K12.7 69.21,69.22 70.48,67.95 76.2,67.95 77.96,66.19 VD25.C 82.06,66.19 83.82,67.95 88.9,67.95 X4.7
13K1-1: length 14.6
  BOTTOM w1: X5.10 VD26.C K13.5
13K1-2: length 26.5
  BOTTOM w1: X4.10 88.9,57.78 83.82,57.78 82.06,59.55 VD26.A 77.96,59.55 76.2,57.78 70.48,57.78 69.21,56.52 K13.4
13K2-1: length 14.6
  TOP w1: X5.9 VD27.A K13.6
13K2-2: length 26.5
  TOP w1: K13.7 69.21,59.05 70.48,57.78 76.2,57.78 77.96,56.02 VD27.C 82.06,56.02 83.82,57.78 88.9,57.78 X4.9
14K1-1: length 14.6
  BOTTOM w1: K14.5 VD28.C X5.12
14K1-2: length 26.5
  BOTTOM w1: K14.4 69.21,46.35 70.48,47.62 76.2,47.62 77.96,49.38 VD28.A 82.06,49.38 83.82,47.62 88.9,47.62 X4.12
14K2-1: length 14.6
  TOP w1: X5.11 VD29.A K14.6
14K2-2: length 26.5
  TOP w1: K14.7 69.21,48.89 70.48,47.62 76.2,47.62 77.96,45.87 VD29.C 82.06,45.87 83.82,47.62 88.9,47.62 X4.11
15K1-1: length 14.6
  BOTTOM w1: X5.14 VD30.C K15.5
15K1-2: length 26.5
  BOTTOM w1: X4.14 88.9,37.47 83.82,37.47 82.06,39.23 VD30.A 77.96,39.23 76.2,37.47 70.48,37.47 69.21,36.2 K15.4
15K2-1: length 14.6
  TOP w1: X5.13 VD31.A K15.6
15K2-2: length 26.5
  TOP w1: X4.13 88.9,37.47 83.82,37.47 82.06,35.7 VD31.C 77.96,35.7 76.2,37.47 70.48,37.47 69.21,38.73 K15.7
16K1-1: length 14.6
  BOTTOM w1: K16.5 VD32.C X5.16
16K1-2: length 26.5
  BOTTOM w1: X4.16 88.9,27.3 83.82,27.3 82.06,29.06 VD32.A 77.96,29.06 76.2,27.3 70.48,27.3 69.21,26.04 K16.4
16K2-1: length 14.6
  TOP w1: X5.15 VD33.A K16.6
16K2-2: length 26.5
  TOP w1: X4.15 88.9,27.3 83.82,27.3 82.06,25.55 VD33.C 77.96,25.55 76.2,27.3 70.48,27.3 69.21,28.58 K16.7
+24BE: length 340.3
  TOP w0.4: R21.1 20.48,6.51 20.32,6.35 ; DA2.8 C8.1 38.1,17.14
  TOP w0.5: DD4.10 34.92,48.89 36.19,50.16 46.35,50.16 48.26,48.26 48.26,34.29 43.18,29.21 AV1.6
  TOP w0.6: 36.19,6.35 C7.1 C2.1 48.26,6.35 48.41,6.2 50.8,6.2 ; X1.C32 44.83,89.28 49.53,93.98 49.53,147.96 46.35,151.13 37.46,151.13 35.56,149.22 DD3.10
  TOP w1: X1.A32 7.87,89.28 8.25,88.9 ; AV1.1 30.97,29.21 31.68,28.5 ; 8.25,88.9 8.64,89.28 X1.C32 C1.1 ; 8.25,88.9 8.25,9.53 11.43,6.35 36.19,6.35 38.1,8.26 38.1,22.23 36.19,24.13 AV1.4 32.38,24.13 31.68,24.84 31.68,28.5 ; 31.68,28.5 32.38,29.21 AV1.6
+UK: length 368.5
  TOP w0.25: v1(35.56,21.59) 31.75,21.59 31.11,20.95 C6.1 29.84,19.69 ; 29.84,15.88 29.84,19.69 ; 29.84,15.88 DA2.2 ; 29.84,15.88 31.11,14.61 DA2.6 ; 29.84,19.69 C5.1 ; v1(40.64,21.59) 40.64,24.77
  TOP w0.6: K16.1 52.7,33.66 52.7,68.58 50.8,70.48 DD2.10 ; DD1.10 49.53,171.45 53.97,167 53.97,139.7 61.59,132.08
  TOP w1: 61.67,24.4 61.45,24.62 K16.1 VD3.C 40.64,24.77 38.73,26.67 AV1.5
  BOTTOM w0.25: v1(35.56,21.59) v1(40.64,21.59)
  BOTTOM w1: 59.69,152.4 59.69,142.24 ; 59.69,152.4 K6.1 ; 59.69,152.4 59.69,162.56 ; 59.69,142.24 59.69,132.08 ; 59.69,142.24 K7.1 ; 59.69,55.24 59.69,65.41 ; 59.69,55.24 K13.1 ; 59.69,55.24 59.69,45.09 ; 59.69,65.41 59.69,75.57 ; 59.69,65.41 K12.1 ; 59.69,132.08 59.69,95.89 ; 59.69,132.08 61.59,132.08 ; 59.69,182.88 59.69,172.72 ; 59.69,182.88 59.69,193.04 ; 59.69,182.88 K3.1 ; 59.69,172.72 59.69,162.56 ; 59.69,172.72 K4.1 ; 59.69,193.04 K2.1 ; 59.69,193.04 59.69,203.2 K1.1 ; 59.69,162.56 K5.1 ; 59.69,95.89 59.69,85.73 ; 59.69,95.89 K9.1 ; K10.1 59.69,85.73 ; 59.69,85.73 59.69,75.57 ; K16.1 59.69,24.77 59.69,34.92 ; 59.69,75.57 K11.1 ; K14.1 59.69,45.09 ; 59.69,45.09 59.69,34.92 ; K15.1 59.69,34.92
CC0: length 3.2
  TOP w0.25: R1.1 DD3.8
CC1: length 8.3
  TOP w0.25: DD3.7 R24.1
CC2: length 3.2
  TOP w0.25: R25.1 DD3.6
CC3: length 8.3
  TOP w0.25: R26.1 DD3.5
CC4: length 3.2
  TOP w0.25: R27.1 DD3.4
CC5: length 8.3
  TOP w0.25: R28.1 DD3.3
CC6: length 3.2
  TOP w0.25: R29.1 DD3.2
CC7: length 8.3
  TOP w0.25: R30.1 DD3.1
CC8: length 3.2
  TOP w0.25: R31.1 DD4.8
CC9: length 8.3
  TOP w0.25: R32.1 DD4.7
CC10: length 3.2
  TOP w0.25: R33.1 DD4.6
CC11: length 8.3
  TOP w0.25: R34.1 DD4.5
CC12: length 3.2
  TOP w0.25: R35.1 DD4.4
CC13: length 8.3
  TOP w0.25: R36.1 DD4.3
CC14: length 3.2
  TOP w0.25: R37.1 DD4.2
CC15: length 8.3
  TOP w0.25: R38.1 DD4.1
CO0: length 61.1
  TOP w0.25: R1.2 36.83,168.91 39.37,171.45 39.37,176.53 44.45,181.61 DD1.18
  TOP w0.4: K1.10 59.05,208.28 57.15,206.38 57.15,187.33 51.43,181.61 DD1.18
CO1: length 44.2
  TOP w0.25: DD1.17 44.45,180.34 40,175.9 40,170.81 38.1,168.91 R24.2
  TOP w0.4: K2.10 58.42,194.94 58.42,186.69 52.07,180.34 DD1.17
CO2: length 39
  TOP w0.25: DD1.16 44.45,179.07 40.64,175.26 40.64,170.18 39.37,168.91 R25.2
  TOP w0.4: K3.10 52.7,179.07 DD1.16
CO3: length 28.4
  TOP w0.25: DD1.15 44.45,177.8 41.27,174.62 41.27,169.55 40.64,168.91 R26.2
  TOP w0.4: K4.10 DD1.15
CO4: length 35.4
  TOP w0.25: R27.2 41.91,173.99 44.45,176.53 DD1.14
  TOP w0.4: DD1.14 52.7,176.53 61.59,167.64
CO5: length 37.6
  TOP w0.25: 45.49,175.26 44.45,175.26 42.54,173.36 42.54,169.55 43.18,168.91 R28.2
  TOP w0.4: 61.59,157.48 58.42,160.66 58.42,168.91 52.07,175.26 45.49,175.26
CO6: length 49.9
  TOP w0.25: R29.2 44.45,168.91 43.18,170.18 43.18,172.72 44.45,173.99 DD1.12
  TOP w0.4: DD1.12 51.43,173.99 57.15,168.28 57.15,151.77 K7.10
CO7: length 52.1
  TOP w0.25: DD1.11 44.45,172.72 43.81,172.09 43.81,170.82 45.72,168.91 R30.2
  TOP w0.4: DD1.11 50.8,172.72 55.88,167.64 55.88,142.88 K8.10
CO8: length 52.8
  TOP w0.25: R31.2 36.19,67.95 38.73,70.48 38.73,75.57 43.81,80.65 DD2.18
  TOP w0.4: K9.10 58.42,97.79 58.42,89.54 49.53,80.65 DD2.18
CO9: length 37.4
  TOP w0.25: R32.2 37.46,67.94 39.37,69.85 39.37,74.93 43.81,79.38 DD2.17
  TOP w0.4: DD2.17 50.16,79.38 K10.10
CO10: length 37
  TOP w0.25: 38.73,62.23 38.73,67.94 40,69.21 40,74.3 43.81,78.11 DD2.16
  TOP w0.4: R33.2 38.73,62.23 ; DD2.16 59.05,78.11 K11.10
CO11: length 31.7
  TOP w0.25: R34.2 40,67.95 40.64,68.58 40.64,73.66 43.81,76.84 DD2.15
  TOP w0.4: DD2.15 55.24,76.84 K12.10
CO12: length 43.5
  TOP w0.25: R35.2 41.27,73.03 43.81,75.57 DD2.14
  TOP w0.4: DD2.14 54.61,75.57 58.42,71.75 58.42,63.5 K13.10
CO13: length 45.7
  TOP w0.25: R36.2 42.54,67.95 41.91,68.58 41.91,72.39 43.81,74.3 DD2.13
  TOP w0.4: DD2.13 53.97,74.3 57.15,71.12 57.15,54.61 K14.10
CO14: length 58
  TOP w0.25: R37.2 43.81,67.95 42.54,69.22 42.54,71.75 43.81,73.03 DD2.12
  TOP w0.4: K15.10 55.88,45.72 55.88,70.48 53.34,73.03 DD2.12
CO15: length 60.2
  TOP w0.25: DD2.11 43.81,71.75 43.18,71.12 43.18,69.85 45.08,67.95 R38.2
  TOP w0.4: DD2.11 52.7,71.75 54.61,69.85 54.61,36.83 K16.10
COMO0: length 121.6
  TOP w0.25: v1(16.51,182.25) RR1.1
  BOTTOM w0.25: X1.A29 6.98,81.66 8.25,82.93 12.44,82.93 13.33,83.82 13.33,179.07 v1(16.51,182.25)
COMO1: length 122.1
  TOP w0.25: RR1.2 29.79,180.97 v1(17.78,180.97)
  BOTTOM w0.25: v1(17.78,180.97) 13.97,177.16 13.97,81.92 12.45,80.39 8.25,80.39 6.98,79.12 X1.A28
COMO2: length 122.7
  TOP w0.25: RR1.3 29.79,179.71 v1(19.05,179.71)
  BOTTOM w0.25: v1(19.05,179.71) 14.6,175.26 14.6,80.01 12.45,77.85 8.25,77.85 6.98,76.58 X1.A27
COMO3: length 123.2
  TOP w0.25: v1(20.32,178.44) 29.74,178.44 RR1.4
  BOTTOM w0.25: X1.A26 6.98,74.04 8.25,75.31 12.44,75.31 15.24,78.11 15.24,173.36 v1(20.32,178.44)
COMO4: length 123.2
  TOP w0.25: RR2.1 v1(20.32,175.9)
  BOTTOM w0.25: v1(20.32,175.9) 15.88,171.45 15.88,76.2 12.45,72.77 8.25,72.77 6.98,71.5 X1.A25
COMO5: length 123.7
  TOP w0.25: RR2.2 v1(21.64,174.58)
  BOTTOM w0.25: v1(21.64,174.58) 21.54,174.58 16.51,169.55 16.51,74.3 12.44,70.23 8.25,70.23 6.98,68.96 X1.A24
COMO6: length 124.1
  TOP w0.25: RR2.3 v1(22.91,173.31)
  BOTTOM w0.25: X1.A23 6.98,66.42 8.25,67.69 12.45,67.69 17.14,72.39 17.14,167.54 v1(22.91,173.31)
COMO7: length 124.8
  TOP w0.25: v1(24.13,172.09) 24.23,171.99 RR2.4
  BOTTOM w0.25: X1.A22 6.98,63.88 8.25,65.15 12.45,65.15 17.78,70.48 17.78,165.74 v1(24.13,172.09)
COMO8: length 18.6
  TOP w0.25: RR3.1 11.18,81.28 X1.C29
COMO9: length 18.8
  TOP w0.25: X1.C28 14.99,79.12 15.88,80.01 29.16,80.01 RR3.2
COMO10: length 19.3
  TOP w0.25: RR3.3 29.16,78.74 15.88,78.74 13.72,76.58 X1.C27
COMO11: length 19.9
  TOP w0.25: RR3.4 29.11,77.47 15.88,77.47 12.45,74.04 X1.C26
COMO12: length 19.8
  TOP w0.25: X1.C25 16.89,71.5 20.32,74.93 RR4.1
COMO13: length 20.4
  TOP w0.25: X1.C24 15.62,68.96 20.32,73.66 29.16,73.66 29.21,73.61
COMO14: length 20.9
  TOP w0.25: X1.C23 14.35,66.42 20.32,72.39 29.16,72.39 RR4.3
COMO15: length 21.5
  TOP w0.25: X1.C22 13.08,63.88 20.32,71.12 29.11,71.12 RR4.4
ENABLE: length 25.6
  TOP w0.25: X1.C13 14.22,41.02 16.51,38.73 16.51,28.58 18.41,26.67 R18.2
  BOTTOM w0.25: X1.A13 X1.C13
KCOMO0: length 105.7
  TOP w0.25: R9.1 v1(21.59,144.15)
  BOTTOM w0.25: v1(21.59,144.15) 21.59,63.5 20.7,62.61 8.25,62.61 6.98,61.34 X1.A21
KCOMO1: length 110.5
  TOP w0.25: R8.1 v1(22.86,142.88)
  BOTTOM w0.25: v1(22.86,142.88) 22.22,142.24 22.22,62.87 19.42,60.07 8.25,60.07 6.98,58.8 X1.A20
KCOMO2: length 105.2
  TOP w0.25: R7.1 v1(24.13,141.61)
  BOTTOM w0.25: v1(24.13,141.61) 22.86,140.34 22.86,62.24 18.15,57.53 8.25,57.53 6.98,56.26 X1.A19
KCOMO3: length 110.1
  TOP w0.25: R6.1 v1(25.4,140.34)
  BOTTOM w0.25: v1(25.4,140.34) 23.49,138.43 23.49,61.61 16.88,54.99 8.25,54.99 6.98,53.72 X1.A18
KCOMO4: length 104.8
  TOP w0.25: R5.1 v1(26.67,139.06)
  BOTTOM w0.25: X1.A17 6.98,51.18 8.25,52.45 15.61,52.45 24.13,60.97 24.13,136.53 v1(26.67,139.06)
KCOMO5: length 109.7
  TOP w0.25: R4.1 v1(27.94,137.8)
  BOTTOM w0.25: X1.A16 6.98,48.64 8.25,49.91 14.34,49.91 24.76,60.34 24.76,134.62 v1(27.94,137.8)
KCOMO6: length 104.7
  TOP w0.25: R3.1 28.57,136.53 v1(27.94,135.89)
  BOTTOM w0.25: v1(27.94,135.89) 25.4,133.35 25.4,59.7 13.07,47.37 8.25,47.37 6.98,46.1 X1.A15
KCOMO7: length 109.6
  TOP w0.25: v1(29.21,134.62) 30.48,134.62 31.11,135.25 R2.1
  BOTTOM w0.25: v1(29.21,134.62) 26.03,131.44 26.03,59.07 11.8,44.83 8.25,44.83 6.98,43.56 X1.A14
KCOMO8: length 27.4
  TOP w0.25: R17.1 27.94,43.18 22.22,48.89 22.22,51.43 12.32,61.34 X1.C21
KCOMO9: length 32
  TOP w0.25: X1.C20 13.59,58.8 21.59,50.8 21.59,48.26 27.94,41.91 R16.1
KCOMO10: length 26.4
  TOP w0.25: R15.1 27.94,40.64 20.95,47.62 20.95,50.16 14.86,56.26 X1.C19
KCOMO11: length 29.4
  TOP w0.25: R14.1 26.67,39.37 12.32,53.72 X1.C18
KCOMO12: length 23.8
  TOP w0.25: X1.C17 13.59,51.18 26.67,38.1 R13.1
KCOMO13: length 28.4
  TOP w0.25: R12.1 26.67,36.83 14.86,48.64 X1.C16
KCOMO14: length 22.8
  TOP w0.25: X1.C15 16.13,46.1 26.67,35.56 R11.1
KCOMO15: length 27.3
  TOP w0.25: X1.C14 17.4,43.56 26.67,34.29 R10.1
KENABLE: length 31.8
  TOP w0.25: R22.2 17.78,17.78 15.24,20.32 15.24,36.83 13.59,38.48 X1.C12
  BOTTOM w0.25: X1.A12 X1.C12
N1355638: length 13.1
  TOP w0.453: VD3.A 54.16,20.46 ; VD3.A 52.7,21.92 ; VD3.A 51.25,20.46 ; VD3.A 52.7,19.01 ; R19.1 46.99,16.54 ; R19.1 46.99,13.94 ; R19.1 47.92,15.24 ; C3.1 48.04,18.41 ; C3.1 46.99,19.74 ; C3.1 46.99,17.09
N1355646: length 14.7
  TOP w0.25: R23.2 R21.2 C4.1 DA2.3 29.84,14.61 31.11,13.34 DA2.5
N1356446: length 3.5
  TOP w0.25: RR1.5 33.14,178.44 34.29,178.44 34.92,177.8 DD1.4
N1356458: length 3.4
  TOP w0.25: RR1.6 33.09,179.71 34.29,179.71 34.92,179.07 DD1.3
N1356478: length 3.4
  TOP w0.25: DD1.2 34.92,180.34 34.29,180.97 33.09,180.97 RR1.7
N1356494: length 3.4
  TOP w0.25: RR1.8 34.29,182.25 34.92,181.61 DD1.1
N1356502: length 3.4
  TOP w0.25: RR2.8 34.29,175.9 34.92,176.53 DD1.5
N1356524: length 3.4
  TOP w0.25: 36.19,175.26 34.92,175.26 34.29,174.62 33.09,174.62 RR2.7
N1356542: length 3.4
  TOP w0.25: RR2.6 33.09,173.36 34.29,173.36 34.92,173.99 DD1.7
N1356554: length 3.5
  TOP w0.25: DD1.8 34.92,172.72 34.29,172.09 33.14,172.09 RR2.5
N1357124: length 3.5
  TOP w0.25: 32.41,77.37 32.51,77.47 33.65,77.47 34.29,76.84 DD2.4
N1357136: length 3.4
  TOP w0.25: DD2.3 34.29,78.11 33.65,78.74 32.46,78.74 32.41,78.69
N1357148: length 3.4
  TOP w0.25: 32.41,79.96 32.46,80.01 33.65,80.01 34.29,79.38 DD2.2
N1357164: length 3.4
  TOP w0.25: DD2.1 34.29,80.65 33.65,81.28 32.41,81.28
N1357172: length 3.4
  TOP w0.25: 32.41,74.93 33.65,74.93 34.29,75.57 DD2.5
N1357190: length 3.4
  TOP w0.25: DD2.6 34.29,74.3 33.65,73.66 32.46,73.66 32.41,73.61
N1357214: length 3.4
  TOP w0.25: 32.41,72.34 32.46,72.39 33.65,72.39 34.29,73.03 DD2.7
N1357226: length 3.5
  TOP w0.25: DD2.8 34.29,71.75 33.65,71.12 32.51,71.12 32.41,71.02
N1358398: length 12
  TOP w0.4: C3.2 R19.2 46.81,12.42 R20.2 47.62,12.07 48.89,10.79 50.8,10.79
N1359348: length 16.4
  TOP w0.25: DD3.15 41.91,140.97 40,139.06 R5.2
N1359364: length 9.2
  TOP w0.25: DD3.14 40.64,141.61 39.37,140.34 R6.2
N1359384: length 12.1
  TOP w0.25: DD3.13 39.37,142.24 38.73,141.61 R7.2
N1359396: length 4.7
  TOP w0.25: R8.2 38.1,143.05 DD3.12
N1359412: length 6.3
  TOP w0.25: R9.2 34.92,144.15 36.83,146.05 DD3.11
N1359430: length 13.9
  TOP w0.25: R4.2 41.27,137.8 43.18,139.7 DD3.16
N1359442: length 21.1
  TOP w0.25: DD3.17 44.45,139.06 41.91,136.53 R3.2
N1359460: length 18.2
  TOP w0.25: R2.2 42.54,135.25 45.72,138.43 DD3.18
N1359476: length 18.2
  TOP w0.25: R10.2 41.91,34.29 45.08,37.47 DD4.18
N1359548: length 21.1
  TOP w0.25: DD4.17 43.81,38.1 41.27,35.56 R11.2
N1359630: length 13.9
  TOP w0.25: R12.2 40.64,36.83 42.54,38.73 DD4.16
N1359720: length 16.4
  TOP w0.25: DD4.15 41.27,40.01 39.37,38.1 R13.2
N1359780: length 9.2
  TOP w0.25: DD4.14 40,40.64 38.73,39.37 R14.2
N1359844: length 12.1
  TOP w0.25: R15.2 38.1,40.64 38.73,41.27 DD4.13
N1359856: length 4.7
  TOP w0.25: R16.2 37.46,42.09 DD4.12
N1359868: length 6.3
  TOP w0.25: R17.2 34.29,43.18 36.19,45.09 DD4.11
N1360082: length 3.3
  TOP w0.25: AV1.2 R18.1
N1360698: length 4.7
  TOP w0.25: R22.1 24.13,17.78 24.76,17.14 DA2.1

## Copper pours and planes (outline as drawn; the poured copper is in the pictures)
GNDE on TOP: 61.59,229.14 61.01,230.56 59.59,231.14 3.9,231.14 2.49,230.56 1.9,229.14 1.9,3.91 2.49,2.49 3.9,1.91 59.59,1.91 61.01,2.49 61.59,3.91 ; 6 cut-outs
GNDE on BOTTOM: 61.59,229.14 61.01,230.56 59.59,231.14 3.9,231.14 2.49,230.56 1.9,229.14 1.9,3.91 2.49,2.49 3.9,1.91 59.59,1.91 61.01,2.49 61.59,3.91 ; 1 cut-out
N1355638 on TOP: 61.59,23.5 48.89,23.5 47.23,23.07 46.35,21.59 46.35,12.7 61.59,12.7
N1355638 on TOP: 61.59,12.7 61.59,3.91 61.01,2.49 59.59,1.91 50.89,1.91 49.48,2.49 48.89,3.91 48.89,12.7

## Text on the board
Ref Des/Silkscreen Top: A1 | C1 | January 2013 | KPRM_02v1
DISPLAY_TOP: January 2013 | KPRM_02v1
PLACE_BOUND_BOTTOM: FIGURE | SIZE | 0.5 | 1.0 | 2.0 | 3.2 | DRILL CHART: TOP to BOTTOM | ALL UNITS ARE IN MILLIMETERS | PLATED | QTY | 223 | 192 | 60 | 4 | 5
